# Altium PCB Sterownik wytrawiarki PCB.PcbDoc
Units mm, origin at the board's own origin, x right, y up, seen from the top; angles counter-clockwise.
Board outline 83.6 x 50.6 mm, 2 copper layers (Top Layer, Bottom Layer); 24 components, 29 nets, 107 pads, 4 vias.
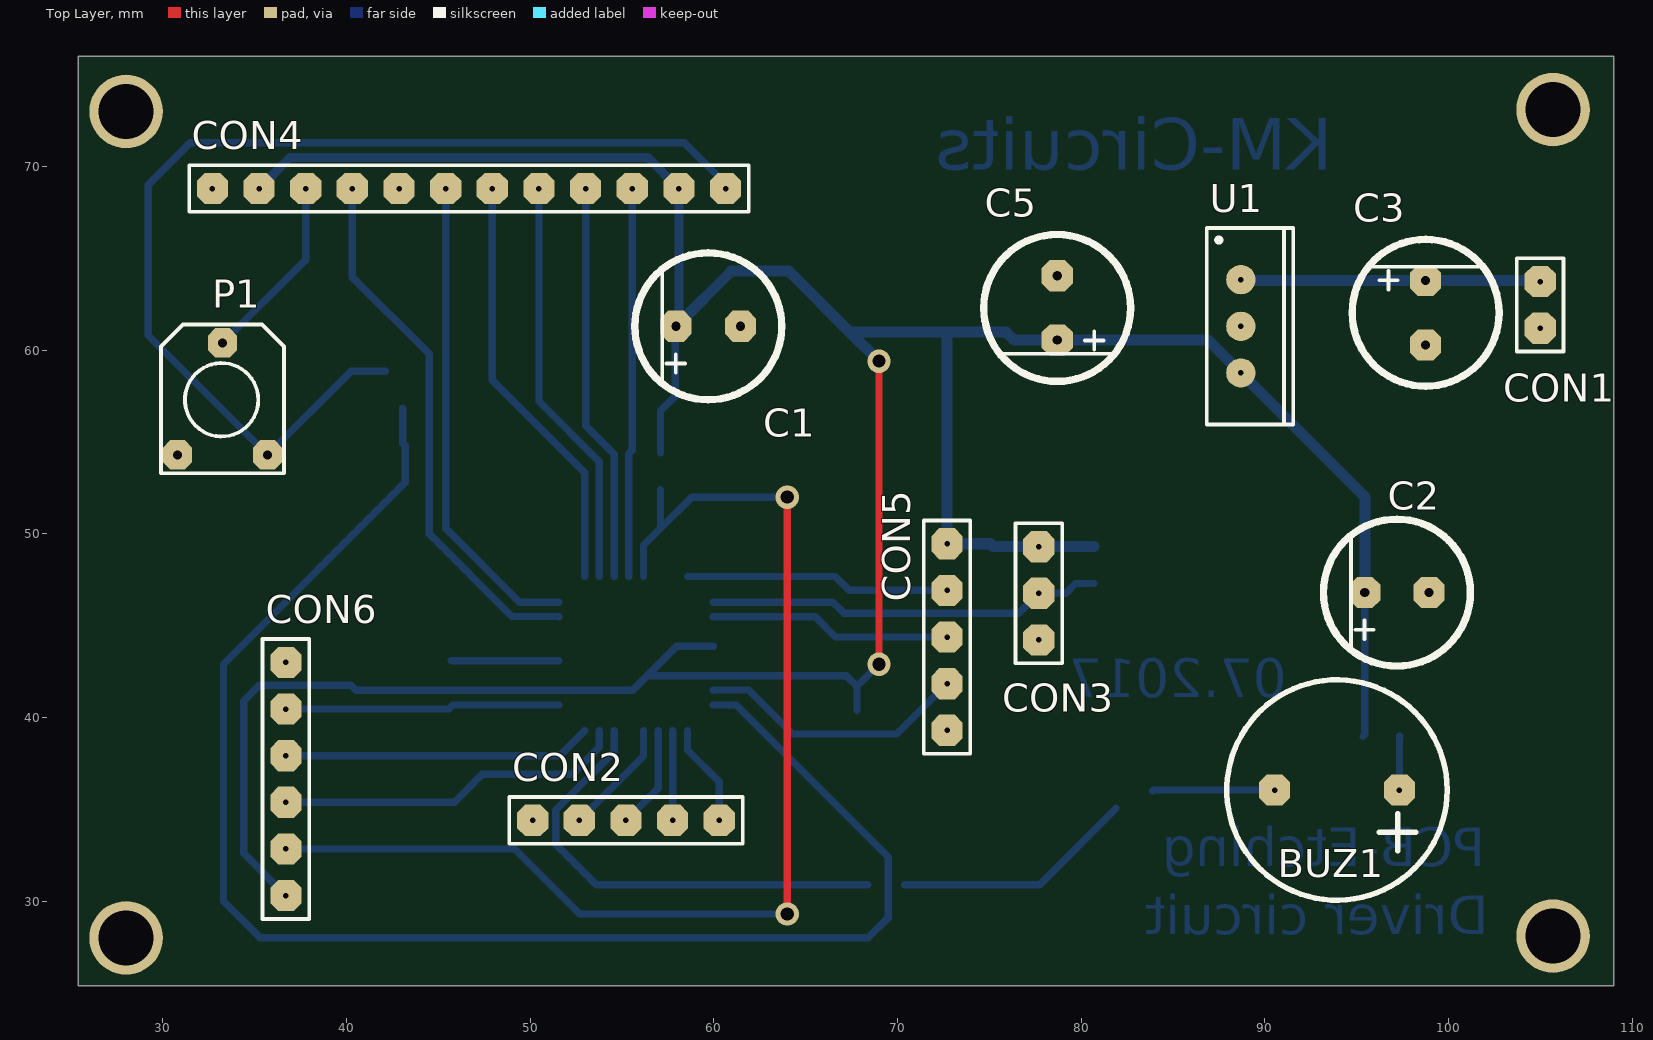
[diagram p0: Top Layer view]
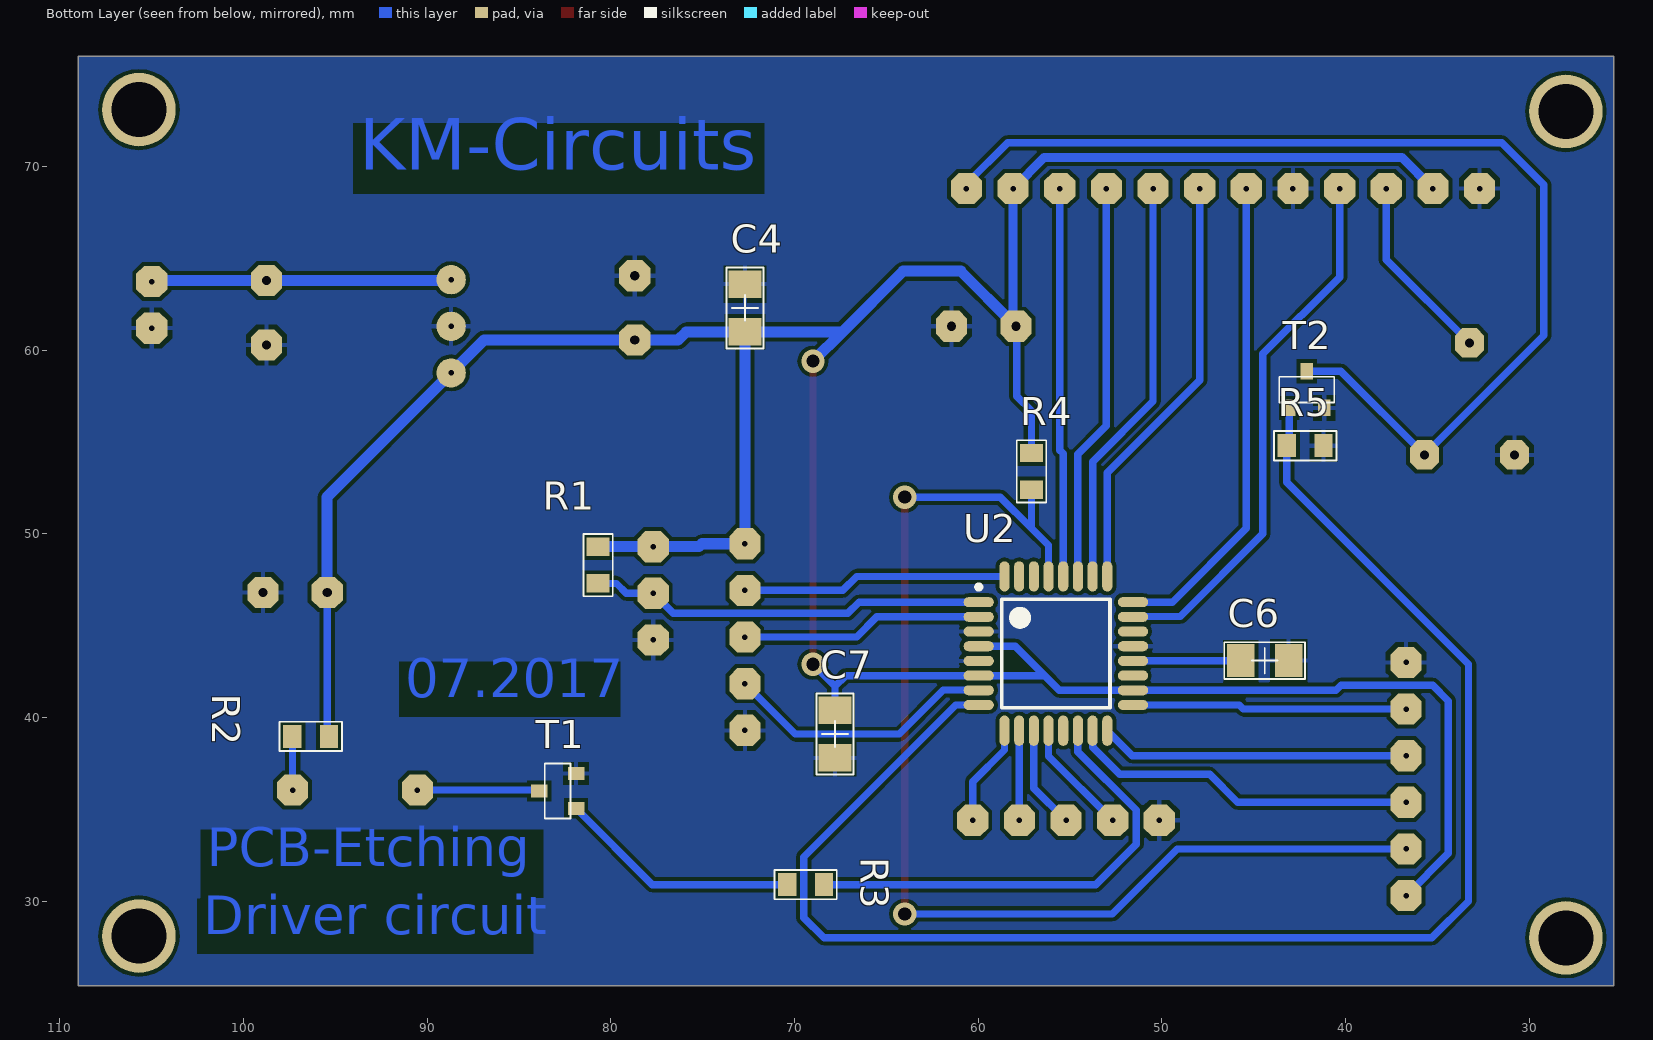
[diagram p1: Bottom Layer view, seen from below]
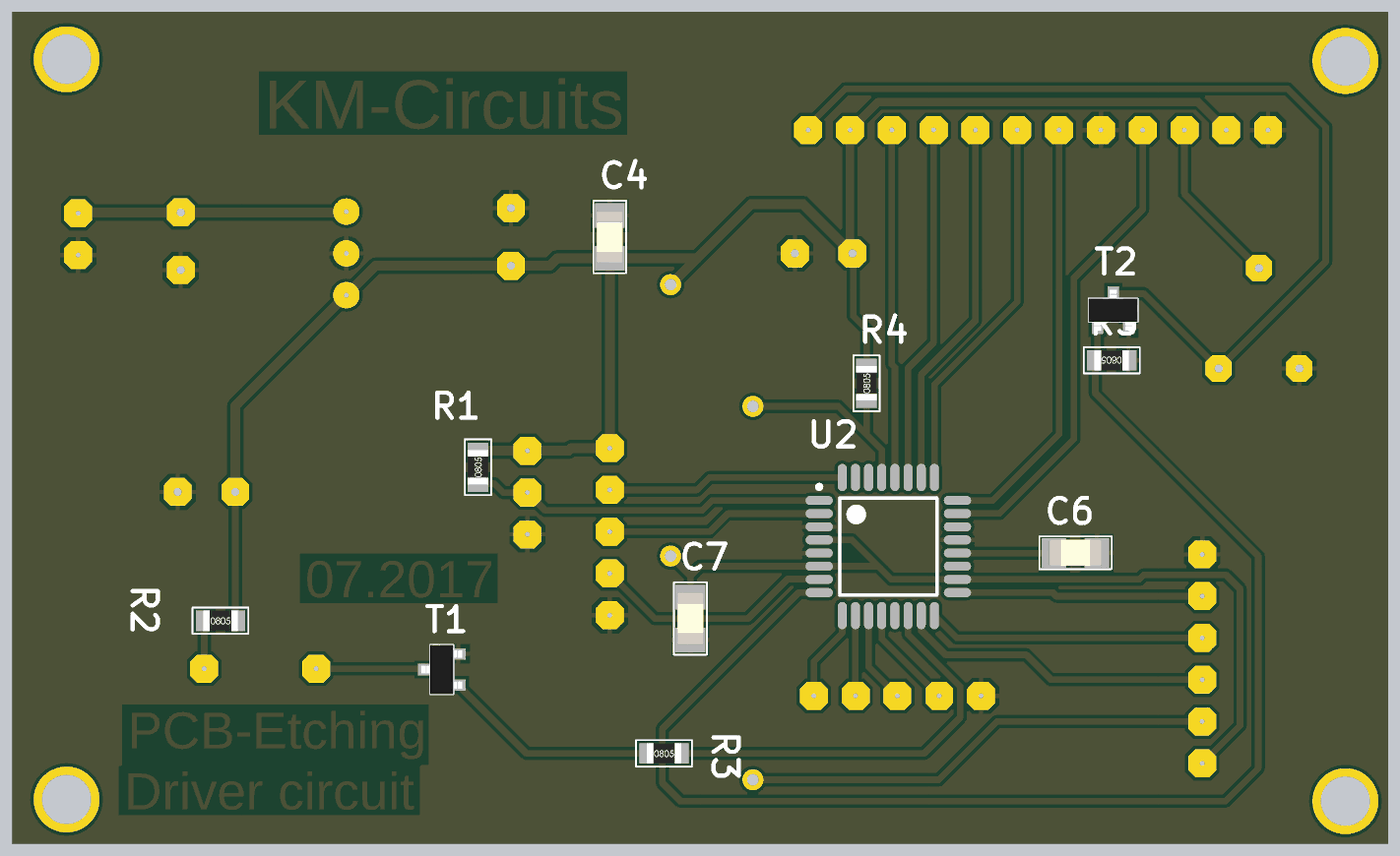
[diagram p2: 3D render of the assembled board from below, using the file's embedded part models]

## Layer stack, top to bottom
Top Solder: solder mask 0.0102, Solder Resist, Dk 3.5
Top Layer: signal copper 0.0356
Dielectric 1: dielectric 0.32, FR-4, Dk 4.8
Bottom Layer: signal copper 0.0356
Bottom Solder: solder mask 0.0102, Solder Resist, Dk 3.5

## Board outline
25.4,25.4 109,25.4 109,76 25.4,76

## Design rules (kind name [scope] priority, off if disabled: settings)
Clearance [All] p1: gap=0.2
HoleSize [All] p1: absolutevalues=TRUE maxlimit=5 minlimit=0.025 maxpercent=80.000 minpercent=20.000
HoleToHoleClearance [All] p1: gap=0.2 allowstackedmicrovias=TRUE
MinimumSolderMaskSliver [All] p1: minsoldermaskwidth=0
PolygonConnect [All] p1: connectstyle=Relief reliefconductorwidth=0.254 reliefentries=4 polygonreliefangle="90 Angle" airgapwidth=0.254
RoutingVias [All] p1: holewidth=0.711 width=1.27 viastyle="Through Hole" minholewidth=0.711 minwidth=1.27 maxholewidth=0.711 maxwidth=1.27
SilkToSilkClearance [All] p1: silktosilkclearance=0
SilkToSolderMaskClearance [IsPad] p1: minsilkscreentomaskgap=0 clearancetoexposedcopper=TRUE
SolderMaskExpansion [All] p1: expansion=0
Width [All] p1: maxlimit=3 minlimit=0.2 preferedwidth=0.4
25 further rules are at their usual default settings.

## Components (designator, comment, footprint, x,y, rotation, side; value= is the part's Value field where it differs from the comment)
BUZ1 "Buzzer" "BUZZER 12mm" 93.936,36.051 r180 top
C1 "Kondensator spolaryzowany" "CAP 8mm" 59.7,61.3 r180 top
C2 "Kondensator spolaryzowany" "CAP 8mm" 97.2,46.8 r180 top
C3 "Kondensator spolaryzowany" "CAP 8mm" 98.762,62.038 r90 top
C4 "Kondensator" "CAP 1206" 72.7,62.3 r270 bottom
C5 "Kondensator spolaryzowany" "CAP 8mm" 78.7,62.3 r270 top
C6 "Kondensator" "CAP 1206" 44.4,43.1 r0 bottom
C7 "Kondensator" "CAP 1206" 67.8,39.1 r90 bottom
CON1 "Supply" HDR1X2 105,61.2 r90 top
CON2 "Buttons" HDR1X5 60.3,34.4 r180 top
CON3 "DS18B20" HDR1X3 77.7,49.3 r270 top
CON4 "LCD" HDR1X12 32.7,68.8 r0 top
CON5 "Driver" HDR1X5 72.7,39.3 r90 top
CON6 "PROG." HDR1X6 36.7,30.3 r90 top
P1 "Potencjometr" "Potencjometr montażowy" 35.7,54.3 r180 top
R1 "Rezystor" 0805 80.7,48.3 r90 bottom
R2 "Rezystor" 0805 96.349,38.972 r180 bottom
R3 "Rezystor" 0805 69.4,30.9 r180 bottom
R4 "Rezystor" 0805 57.1,53.4 r90 bottom
R5 "Rezystor" 0805 42.2,54.8 r0 bottom
T1 "BC847" SOT23 82.9,36 r90 bottom
T2 "BSS138" SOT23 42.111,57.854 r180 bottom
U1 "LM7805" TO-220 88.7,61.3 r270 top
U2 "ATmega8A-AU" 32A_N 55.772,43.48 r180 bottom

## Footprints (in the part's own frame and the unit in brackets; to place one, negate y for a bottom-side part, rotate by r counter-clockwise, add the part's x,y. Pads: shape width x height; smd on the part's side, far side on the other; paste and mask are expansions set on the pad)
32A_N [mm] "Thin QFP, 32-Leads, Body 7x7mm, Pitch 0.8mm, IPC Medium Density"
  oval 1.65x0.55 smd: 1(-4.2,2.8) 2(-4.2,2) 3(-4.2,1.2) 4(-4.2,0.4) 5(-4.2,-0.4) 6(-4.2,-1.2) 7(-4.2,-2) 8(-4.2,-2.8) 17(4.2,-2.8) 18(4.2,-2) 19(4.2,-1.2) 20(4.2,-0.4) 21(4.2,0.4) 22(4.2,1.2) 23(4.2,2) 24(4.2,2.8)
  oval 0.55x1.65 smd: 9(-2.8,-4.2) 10(-2,-4.2) 11(-1.2,-4.2) 12(-0.4,-4.2) 13(0.4,-4.2) 14(1.2,-4.2) 15(2,-4.2) 16(2.8,-4.2) 25(2.8,4.2) 26(2,4.2) 27(1.2,4.2) 28(0.4,4.2) 29(-0.4,4.2) 30(-1.2,4.2) 31(-2,4.2) 32(-2.8,4.2)
  silkscreen extent -4.33,-2.95 2.95,3.75, body extent -3.5,-3.5 3.5,3.5, height 1.2
0805 [mm] "SOD80C"
  rect 1x1.25 smd: 1(-1,0) 2(1,0)
  silkscreen extent -1.7,-0.8 1.7,0.8, body extent -1.05,-0.62 1.05,0.63, height 0.76
"BUZZER 12mm" [mm] "BUZZER 12mm 2x 0.7mm"
  oct 1.7x1.7 hole 0.3: V+(-3.4,0) V-(3.4,0)
  silkscreen extent -6,-6 6,6
"CAP 8mm" [mm] "Kondensator polimerowy ( płyta główna )"
  oct 1.7x1.7 hole 0.5: 1(-1.75,0) 2(1.75,0)
  silkscreen extent -4,-4 4,4
"CAP 1206" [mm] "Kondensator SMD 1206"
  rect 1.5x1.8 smd: 1(-1.3,0) 2(1.3,0)
  silkscreen extent -2.2,-1 2.2,1, body extent -1.6,-0.8 1.6,0.8, height 1.6
HDR1X2 [mm] "Connector; Header; 2 Position"
  oct 1.7x1.7 hole 0.3: 1(0,0) 2(2.54,0)
  silkscreen extent -1.27,-1.27 3.81,1.27
HDR1X3 [mm] "Connector; Header; 3 Position"
  oct 1.7x1.7 hole 0.3: 1(0,0) 2(2.54,0) 3(5.08,0)
  silkscreen extent -1.27,-1.27 6.35,1.27
HDR1X5 [mm] "Connector; Header; 5 Position"
  oct 1.7x1.7 hole 0.3: 1(0,0) 2(2.54,0) 3(5.08,0) 4(7.62,0) 5(10.16,0)
  silkscreen extent -1.27,-1.27 11.43,1.27
HDR1X6 [mm] "Connector; Header; 6 Position"
  oct 1.7x1.7 hole 0.3: 1(0,0) 2(2.54,0) 3(5.08,0) 4(7.62,0) 5(10.16,0) 6(12.7,0)
  silkscreen extent -1.27,-1.27 13.97,1.27
HDR1X12 [mm] "Connector; Header; 12 Position"
  oct 1.7x1.7 hole 0.3: 1(0,0) 2(2.54,0) 3(5.08,0) 4(7.62,0) 5(10.16,0) 6(12.7,0) 7(15.24,0) 8(17.78,0) 9(20.32,0) 10(22.86,0) 11(25.4,0) 12(27.94,0)
  silkscreen extent -1.27,-1.27 29.21,1.27
"Potencjometr montażowy" [mm] "Potencjometr montażowy 6.7 x 7.7"
  oct 1.6x1.6 hole 0.5: 1(0,0) 2(4.9,0) 3(2.45,-6.1)
  silkscreen extent -0.9,-7.1 5.8,1
SOT23 [mm] "SOT23"
  rect 0.7x0.9 smd: 1(-0.95,-1) 2(0.95,-1) 3(0,1)
  silkscreen extent -1.5,-0.7 1.5,0.7, body extent -1.5,-1.25 1.5,1.25, height 1.05
TO-220 [mm] "TO, Thru-Hole, Vertical, Heatsink Mounted; 3 In-Line Leads; Pitch 2.54 mm"
  round 1.6 hole 0.3: 1(-2.54,0) 2(0,0) 3(2.54,0)
  silkscreen extent -5.35,-1.85 5.35,2.85

## Part data
C4 C6 C7: "Kondensator ceramiczny"
CON1: library part "Header 2", "Header, 2-Pin"
CON2 CON5: library part "Header 5", "Header, 5-Pin"
CON3: library part "Header 3", "Header, 3-Pin"
CON4: library part "Header 12", "Header, 12-Pin"
CON6: library part "Header 6", "Header, 6-Pin"
T1: "NPN (SMD) 100mA"
T2: "N-MOSFET, 220mA (SMD)"
U1: "Stabilizator 5V"
U2: "8-bit AVR Microcontroller, 8KB Flash, 512 Bytes EEPROM, 1KB SRAM, 32-pin TQFP, Industrial Grade (-40癈 to 85癈)"

## Free pads (board coordinates)
  round 4 hole 3: 0(28,28) 0(28,73) 0(105.7,28.1) 0(105.7,73.1)

## Via types
v1: diameter 1.27, hole 0.711, Top Layer to Bottom Layer, 4 vias

## Nets (pads, with @x,y where several pads share a name; then routed paths per layer and width w, separated by ;. In a path a pad name is that pad's centre, name@x,y a point inside that pad or via, vN(x,y) a via of type N, cw(c..) or ccw(c..) an arc to the next point about the centre after c; other vN are vias at no path point)
+5V: C1.2 C2.2 C4.2 C5.2 C7.2 CON3.1 CON4.2 CON4.11 CON5.5 CON6.1 R1.2 R2.2 R4.2 U1.3 U2.4 U2.6 U2.18 | length 187.4
  Top Layer w0.4: v1(69,42.9) v1(69,59.4)
  Bottom Layer w0.4: CON6.1 34.4,32.6 34.4,40.9 35.25,41.75 40.25,41.75 40.52,41.48 U2.18 55.58,41.48 56.38,42.28 ; R4.2 57.1,56.7 57.9,57.5 57.9,61.25 C1.2 ; U2.4 57.98,43.88 56.38,42.28 ; C7.2 67.8,41.7 ; v1(69,42.9) 67.8,41.7 ; R2.2 95.45,39.073 C2.2 ; 56.38,42.28 U2.6 67.22,42.28 67.8,41.7
  Bottom Layer w0.5: CON4.2 36.94,70.5 56.4,70.5 CON4.11 58.1,61.45 C1.2
  Bottom Layer w0.6: C1.2@58.1,61.45 60.95,64.3 64.1,64.3 67.4,61 ; v1(69,59.4) 67.4,61 ; R1.2 CON3.1 75.2,49.3 75.04,49.46 CON5.5 C4.2 ; C2.2 95.45,52.01 U1.3 86.91,60.55 C5.2 76.35,60.55 75.9,61 C4.2 ; 67.4,61 C4.2
GND: C1.1 C2.1 C3.1 C4.1 C5.1 C6.1 C7.1 CON1.1 CON2.5 CON3.3 CON4.1 CON4.5 CON5.1 CON6.6 P1.2 R5.1 T1.2 T2.2 U1.2 U2.3 U2.5 U2.21
NetBUZ1_V+: BUZ1.V+ R2.1 | length 2.9
  Bottom Layer w0.4: BUZ1.V+ 97.336,38.959 R2.1
NetBUZ1_V-: BUZ1.V- T1.3 | length 6.7
  Bottom Layer w0.4: T1.3 83.951,36.051 BUZ1.V-
NetC6_2: C6.2 U2.20 | length 5.9
  Bottom Layer w0.4: C6.2 45.72,43.08 U2.20
NetCON2_1: CON2.1 U2.9 | length 5.6
  Bottom Layer w0.4: U2.9 58.572,38.228 60.3,36.5 CON2.1
NetCON2_2: CON2.2 U2.10 | length 4.9
  Bottom Layer w0.4: CON2.2 57.772,34.412 U2.10
NetCON2_3: CON2.3 U2.11 | length 5.6
  Bottom Layer w0.4: CON2.3 56.972,36.152 U2.11
NetCON2_4: CON2.4 U2.12 | length 6.3
  Bottom Layer w0.4: CON2.4 56.172,37.892 U2.12
NetCON3_2: CON3.2 R1.1 U2.1 | length 21.7
  Bottom Layer w0.4: U2.1 66.49,46.28 67.1,45.67 76.61,45.67 CON3.2 79.16,46.76 79.7,47.3 R1.1
NetCON4_3: CON4.3 P1.3 | length 10.3
  Bottom Layer w0.4: P1.3 37.78,64.93 CON4.3
NetCON4_4: CON4.4 U2.23 | length 29.5
  Bottom Layer w0.4: CON4.4 40.32,63.98 44.5,59.8 44.5,50 49,45.5 51.552,45.5 U2.23
NetCON4_6: CON4.6 U2.24 | length 26.3
  Bottom Layer w0.4: CON4.6 45.4,50.3 49.42,46.28 U2.24
NetCON4_7: CON4.7 U2.25 | length 23.2
  Bottom Layer w0.4: CON4.7 47.94,58.36 52.972,53.328 U2.25
NetCON4_8: CON4.8 U2.26 | length 22.5
  Bottom Layer w0.4: CON4.8 50.48,57.22 53.772,53.928 U2.26
NetCON4_9: CON4.9 U2.27 | length 21.8
  Bottom Layer w0.4: CON4.9 53.02,55.88 54.572,54.328 U2.27
NetCON4_10: CON4.10 U2.28 | length 21.2
  Bottom Layer w0.4: U2.28 55.372,54.372 55.56,54.56 CON4.10
NetCON4_12: CON4.12 P1.1 T2.3 | length 59.3
  Bottom Layer w0.4: T2.3 40.254,58.854 P1.1 29.2,60.8 29.2,69 31.5,71.3 58.4,71.3 60.64,69.06 CON4.12
NetCON5_2: CON5.2 U2.7 | length 14.9
  Bottom Layer w0.4: U2.7 59.992,41.5 61.9,41.5 64.3,39.1 69.96,39.1 CON5.2
NetCON5_3: CON5.3 U2.2 | length 13.2
  Bottom Layer w0.4: U2.2 65.52,45.48 66.62,44.38 CON5.3
NetCON5_4: CON5.4 U2.32 | length 14.5
  Bottom Layer w0.4: U2.32@58.6,47.708 U2.32 66.62,47.68 67.38,46.92 CON5.4
NetCON6_2: CON6.2 R4.1 U2.29 | length 64.2
  Top Layer w0.4: v1(64,29.3) v1(64,52)
  Bottom Layer w0.4: CON6.2 49.16,32.84 52.7,29.3 v1(64,29.3) ; U2.29 56.172,49.372 57.1,50.3 ; R4.1 57.1,50.3 ; v1(64,52) 58.8,52 57.1,50.3
NetCON6_3: CON6.3 U2.15 | length 19.2
  Bottom Layer w0.4: CON6.3 45.88,35.38 47.4,36.9 52.3,36.9 53.772,38.372 U2.15
NetCON6_4: CON6.4 U2.16 | length 16.8
  Bottom Layer w0.4: CON6.4 51.612,37.92 U2.16
NetCON6_5: CON6.5 U2.17 | length 15
  Bottom Layer w0.4: CON6.5 45.56,40.46 45.78,40.68 U2.17
NetR3_1: R3.1 T1.1 | length 13.2
  Bottom Layer w0.4: R3.1 77.75,30.9 T1.1
NetR3_2: R3.2 U2.14 | length 25.4
  Bottom Layer w0.4: U2.14 54.572,38.133 51.4,34.961 51.4,33.1 53.6,30.9 R3.2
NetR5_2: R5.2 T2.1 U2.8 | length 84.8
  Bottom Layer w0.4: T2.1 43.061,54.939 R5.2 43.2,52.8 33.3,42.9 33.3,30 35.3,28 68.4,28 69.5,29.1 69.5,32.4 61.22,40.68 U2.8
V+: C3.2 CON1.2 U1.1 | length 16.4
  Bottom Layer w0.6: U1.1 88.752,63.788 C3.2 104.852,63.788 CON1.2@105,63.64
pads on no net: U2.13 U2.19 U2.22 U2.30 U2.31

## Polygon pours and split planes (outlines as drawn)
GND on Bottom Layer "GND_Polygon" (solid, pour order 4): 25.4,25.4 109,25.4 109,76 25.4,76

## Other copper
Bottom Layer:
  text "KM-Circuits" at 93.7,68.9 h4.8
  text "07.2017" at 91.2,40.4 h3.6
  text "PCB-Etching" at 102,31.2 h3.6
  text "Driver circuit" at 102.2,27.5 h3.6